# Altium PCB W040 24011506-06PBS PCB.PcbDoc (part 1 of 3)
Units mil, origin at the board's own origin, x right, y up, seen from the top; angles counter-clockwise.
Board outline 4320.55 x 590.55 mil, 4 copper layers (Top Layer, MidLayer1, MidLayer2, Bottom Layer); 218 components, 121 nets, 685 pads, 487 vias.
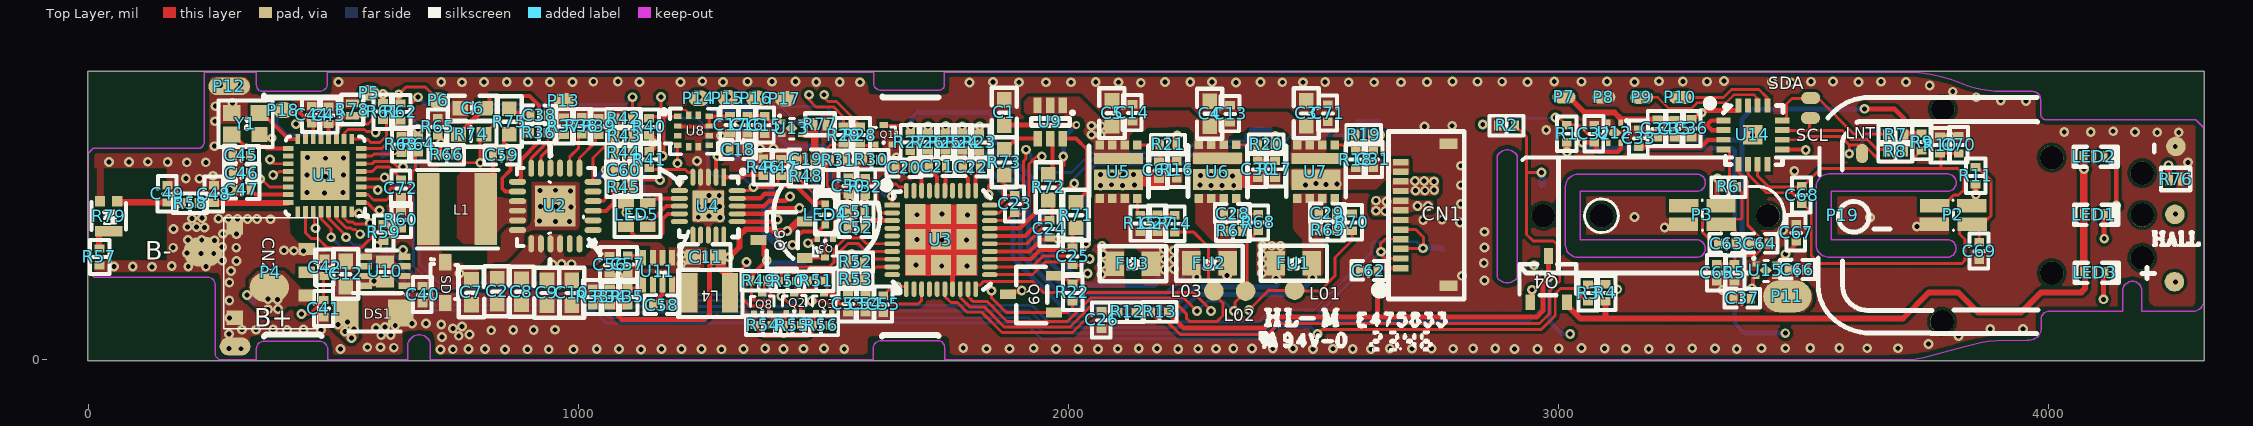
[diagram p0: Top Layer view]
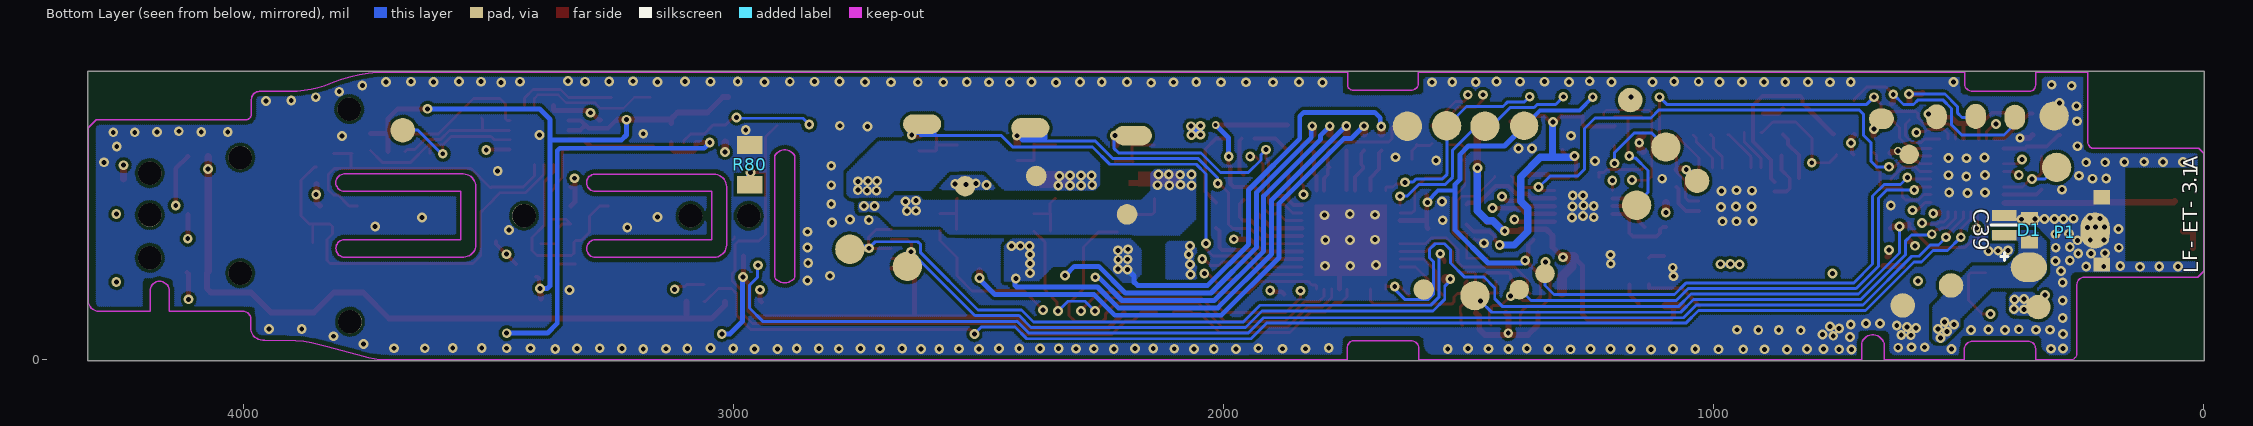
[diagram p1: Bottom Layer view, seen from below]
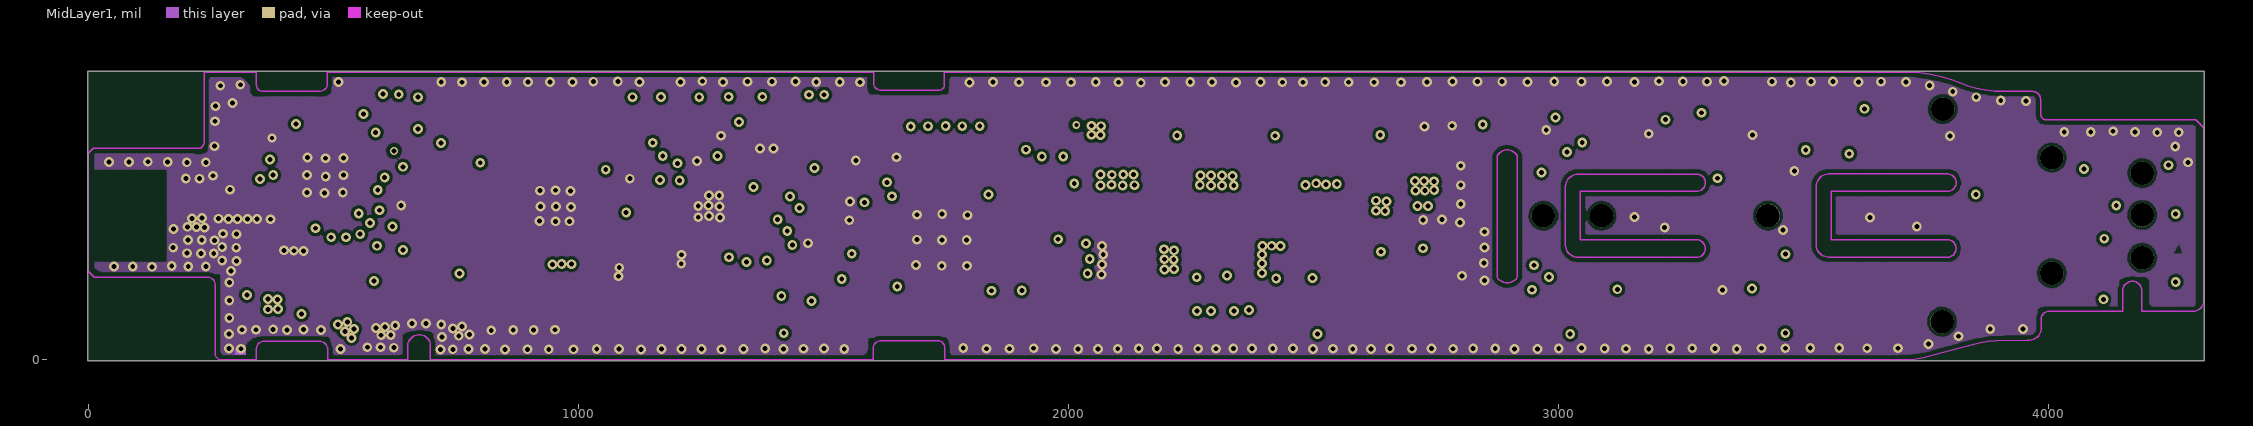
[diagram p2: MidLayer1]
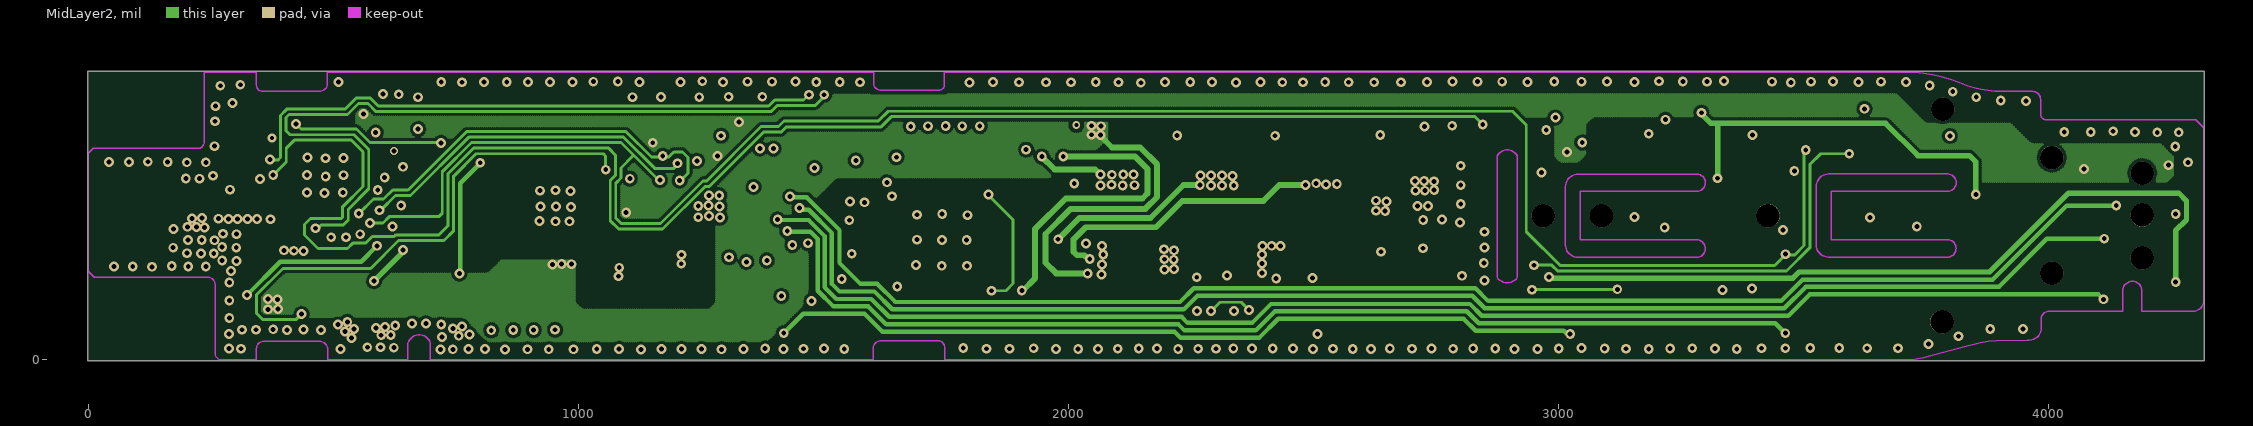
[diagram p3: MidLayer2]

## Layer stack, top to bottom
Top Solder: solder mask 0.4, Solder Resist, Dk 3.5
Top Layer: signal copper 1.4
Dielectric1: core 12.6, FR-4, Dk 4.8
MidLayer1: signal copper 1.4
Dielectric2: prepreg 12.6, FR-4, Dk 4.8
MidLayer2: signal copper 1.4
Dielectric3: core 12.6, FR-4, Dk 4.8
Bottom Layer: signal copper 1.4
Bottom Solder: solder mask 0.4, Solder Resist, Dk 3.5

## Board outline
-1.55,-1.5 4319.01,-1.5 4319.01,589.05 -1.55,589.05

## Design rules (kind name [scope] priority, off if disabled: settings)
Clearance Clearance_2 [All vs OnLayer('Top Layer')] p1 off: gap=5 ignorepadtopadclearanceinfootprint=FALSE except(0: Arc-Hole Track-Hole SMDPad-Hole THPad-Hole Via-Hole Fill-Hole Poly-Hole Region-Hole Text-Hole)
Clearance [All] p2: gap=5 ignorepadtopadclearanceinfootprint=FALSE except(0: Arc-Hole Track-Hole SMDPad-Hole THPad-Hole Via-Hole Fill-Hole Poly-Hole Region-Hole Text-Hole)
Clearance Clearance_1 [All] p3 off: gap=5 ignorepadtopadclearanceinfootprint=FALSE except(0: Arc-Hole Track-Hole SMDPad-Hole THPad-Hole Via-Hole Fill-Hole Poly-Hole Region-Hole Text-Hole)
ComponentClearance [All] p1 off: gap=10 collisioncheckmode=3 verticalgap=10 showdistances=FALSE
HoleSize [All] p1 off: absolutevalues=TRUE maxlimit=1000 minlimit=1 maxpercent=80.000 minpercent=20.000
LayerPairs [All] p1 off: enforce=TRUE
PlaneClearance [All] p1: clearance=10
PlaneConnect [All] p1: planeconnectstyle=Direct reliefexpansion=20 reliefentries=4 reliefconductorwidth=10 reliefairgap=10
PolygonConnect [All] p1 off: connectstyle=Direct reliefconductorwidth=20 reliefentries=4 polygonreliefangle="90 Angle" airgapwidth=10
PolygonConnect PolygonConnect_1 [All] p2: connectstyle=Direct reliefconductorwidth=20 reliefentries=4 polygonreliefangle="90 Angle" airgapwidth=10
RoutingLayers [All] p1: top layer_v5=FALSE mid layer 1_v5=FALSE mid layer 2_v5=FALSE bottom layer_v5=FALSE
RoutingVias [All] p1: holewidth=28 width=50 viastyle="Through Hole" minholewidth=10 minwidth=20 maxholewidth=1000 maxwidth=1000
SilkToSolderMaskClearance SilkscreenOverComponentPads [IsPad] p1: minsilkscreentomaskgap=10 clearancetoexposedcopper=TRUE
SolderMaskExpansion [All] p1: expansion=2 istentingtop=FALSE
Width [All] p1: maxlimit=10000 minlimit=4 preferedwidth=10
23 further rules are at their usual default settings.

## Components (designator, comment, footprint, x,y, rotation, side; value= is the part's Value field where it differs from the comment)
B+ "" SMD-1#1 299.43,27.55 r0 top
B- "NC" SMD-1#2 234.43,220.47 r0 top
C1 "10uF" C0603 1869.43,479.63 r0 top
C2 "22uF" C0603 834.43,114.63 r0 top
C3 "10uF" C0603 2485.68,477.97 r0 top
C4 "10uF" C0603 2288.6,477.13 r0 top
C5 "10uF" C0603 2089.43,478.38 r0 top
C6 "10uF" C0603 759.02,513.8 r270 top
C7 "10uF" C0603 781.93,112.55 r0 top
C8 "22uF" C0603 884.02,113.8 r0 top
C9 "10uF" C0603 936.1,111.72 r0 top
C10 "10uF" C0603 986.52,111.72 r0 top
C11 "22uF" C0603 1234.43,210.05 r270 top
C12 "10uF" C0603 525.27,150.05 r0 top
C13 "1uF" C0402#1 2330.47,484.63 r0 top
C14 "1uF" C0402#1 2131.1,486.72 r0 top
C15 "1uF" C0402#1 1380.68,461.72 r0 top
C16 "1uF" C0402#1 1345.27,462.13 r0 top
C17 "100nF" C0402#1 1309.85,462.13 r0 top
C18 "100nF" C0402#1 1308.6,428.8 r270 top
C19 "4.7uF" C0402#1 1446.93,409.63 r270 top
C20 "1nF" C0402#1 1647.35,392.55 r270 top
C21 "100pF" C0402#1 1715.27,394.63 r270 top
C22 "100pF" C0402#1 1784.43,393.38 r270 top
C23 "4.7uF" C0402#1 1890.89,300.68 r0 top
C24 "4.7uF" C0402#1 1961.52,250.05 r0 top
C25 "4.7uF" C0402#1 2009.02,193.8 r0 top
C26 "100nF" C0402#1 2068.18,63.9 r0 top
C27 "1nF" C0402#1 2181.93,261.3 r0 top
C28 "1nF" C0402#1 2317.77,298.38 r270 top
C29 "1nF" C0402#1 2511.1,299.22 r270 top
C30 "1nF" C0402#1 2386.93,371.3 r0 top
C31 "1nF" C0402#1 2622.35,391.72 r0 top
C32 "4.7uF" C0402#1 3073.6,443.8 r0 top
C33 "1uF" C0402#1 3164.43,435.05 r0 top
C34 "4.7uF" C0402#1 3202.35,454.63 r0 top
C35 "100nF" C0402#1 3237.77,454.22 r0 top
C36 "1uF" C0402#2 3271.93,454.43 r0 top
C37 "1uF" C0402#1 3357.77,125.47 r270 top
C38 "3.3nF" C0402#1 902.35,499.22 r270 top
C39 "100nF" C0402-1 402.35,254.63 r180 bottom
C40 "1uF" C0402#1 682.35,115.47 r0 top
C41 "100nF" C0402#1 480.68,87.13 r0 top
C42 "NC" C0402#1 482.35,171.3 r0 top
C43 "100nF" C0402#1 490.27,481.72 r0 top
C44 "4.7uF" C0402#1 456.1,482.97 r0 top
C45 "1uF" C0402#3 294.85,417.55 r270 top
C46 "NC" C0402#1 295.27,381.3 r270 top
C47 "2.2uF" C0402#1 295.68,347.55 r270 top
C48 "1.5pF" C0402#1 256.52,320.88 r0 top
C49 "1.5pF" C0402#1 161.52,321.3 r0 top
C50 "100nF" C0402#4 1551,338.07 r0 top
C51 "100nF" C0402#1 1549.02,302.34 r270 top
C52 "4.7uF" C0402#1 1549.33,269.63 r270 top
C53 "3.3nF" C0402#1 1550.68,96.72 r0 top
C54 "3.3nF" C0402#1 1586.1,96.72 r0 top
C55 "100nF" C0402#1 1622.35,95.88 r0 top
C56 "100nF" C0402#1 1064.02,176.72 r0 top
C57 "1uF" C0402#1 1101.1,177.13 r0 top
C58 "100nF" C0402#1 1153.18,112.13 r270 top
C59 "100nF" C0402#1 826.1,417.55 r270 top
C60 "100nF" C0402#1 1074.85,387.55 r270 top
C61 "1nF" C0402#1 2185.27,369.22 r0 top
C62 "NC" C0402#1 2595.68,182.13 r270 top
C63 "NC" C0402#1 3326.52,237.55 r270 top
C64 "NC" C0402#1 3394.02,237.55 r270 top
C65 "NC" C0402#1 3323.6,160.05 r0 top
C66 "NC" C0402#1 3470.27,184.22 r270 top
C67 "NC" C0402#1 3485.68,241.72 r0 top
C68 "NC" C0402#1 3496.93,318.8 r0 top
C69 "NC" C0402#1 3859.43,204.63 r0 top
C70 "NC" C0402#1 3817.35,421.3 r0 top
C71 "1uF" C0402#1 2529.85,485.88 r0 top
C72 "10nF" C0402#1 638.18,332.55 r0 top
CN1 "FH34SRJ-12S-0.5SH" SMD-12 2678.6,403.8 r270 top
CN2 "NC" SMD-1#2 369.43,148.38 r0 top
D1 "40V 代用" SOD-323 355.68,288.8 r270 bottom
DS1 "SMF26CA" SMD-128 525.27,96.3 r0 top
FU1 "0.02R" FU0805 2423.18,197.55 r0 top
FU2 "0.02R" FU0805 2251.1,197.13 r0 top
FU3 "0.02R" FU0805 2094.85,196.3 r0 top
L1 "CR4018-2R2M" L1206 693.6,307.97 r0 top
L01 "" DIP-1 2461.93,142.55 r0 top
L02 "" DIP-1 2361.93,140.47 r0 top
L03 "" DIP-1 2297.35,140.88 r0 top
L4 "4.7uH" L0805 1231.52,137.13 r0 top
LED1 "SZYY0402W 白光" LED0402#1 4072.77,296.72 r270 top
LED2 "SZYY0402W 白光" LED0402#1 4072.35,415.05 r270 top
LED3 "SZYY0402W 白光" LED0402#1 4074.43,178.38 r270 top
LED4 "SZYY0402W 白光" LED0402#2 1504.02,276.2 r0 top
LED5 "XL-1615UBUGC翠绿色 蓝色" LED0402-1 1141.52,271.72 r90 top
LNT "" SMD-1#3 3620.27,421.3 r90 top
P1 "78171插座端子2PIN" SMD-2 208.6,332.13 r0 bottom
P2 "丝印被打磨" SMD-4 3767.77,277.13 r0 top
P3 "丝印被打磨" SMD-4 3255.68,277.13 r0 top
P4 "78171插座端子3PIN" SMD-5 445.68,226.3 r180 top
P5 "" SMD-1#4 573.6,545.05 r180 top
P6 "" SMD-1#4 714.02,529.63 r180 top
P7 "" SMD-1#5 3011.93,536.72 r180 top
P8 "" SMD-1#5 3093.18,536.3 r180 top
P9 "" SMD-1#5 3170.27,535.88 r180 top
P10 "" SMD-1#5 3249.43,535.88 r180 top
P11 "" SMD-1#6 3467.77,129.63 r180 top
P12 "" SMD-1#7 287.35,558.38 r180 top
P13 "" SMD-1#4 970.27,529.22 r180 top
P14 "" SMD-1#4 1246.1,534.22 r180 top
P15 "" SMD-1#4 1304.85,534.63 r180 top
P16 "" SMD-1#4 1363.18,533.8 r180 top
P17 "" SMD-1#4 1421.93,533.38 r180 top
P18 "" SMD-1#4 398.18,510.05 r180 top
P19 "" SMD-10 4191.93,381.3 r180 top
Q2 "2SK3541" SOT23-3-1#1 1429.43,96.3 r0 top
Q3 "2SK3541" SOT23-3-1#1 1490.27,95.88 r0 top
Q4 "S8550" SOT23-3#1 2943.18,117.97 r0 top
Q5 "2SK3541" SOT23-3-1#2 1514.95,246.82 r180 top
Q6 "AO3401A" SOT23-3#2 1461.93,207.97 r90 top
Q8 "2SK3541" SOT23-3-1#3 1364.02,95.26 r0 top
Q9 "AO3401A" SOT23-3#2 1971.1,97.13 r90 top
Q11 "2SK3541" SOT23-3-1#1 1611.93,440.05 r0 top
R1 "10K" R0402#1 3017.35,444.63 r0 top
R2 "150K" R0402#1 2877.35,478.8 r270 top
R3 "10K" R0402#1 3061.1,119.22 r0 top
R4 "10K" R0402#1 3096.52,119.63 r0 top
R5 "301K" R0402#1 3359.85,160.88 r0 top
R6 "301K" R0402#1 3330.27,353.38 r270 top
R7 "2K" R0402#1 3671.52,460.05 r270 top
R8 "2K" R0402#1 3671.1,425.05 r270 top
R9 "2K" R0402#1 3741.52,427.55 r0 top
R10 "301K" R0402#1 3779.43,421.3 r0 top
R11 "301K" R0402#1 3851.93,358.8 r0 top
R12 "100R" R0402#2 2102.77,97.97 r270 top
R13 "100K" R0402#2 2169.02,98.38 r270 top
R14 "10R" R0402#1 2217.35,260.88 r0 top
R15 "10K" R0402#1 2146.93,261.3 r0 top
R16 "10K" R0402#1 2221.52,370.88 r0 top
R17 "10K" R0402#1 2421.93,372.13 r0 top
R18 "10K" R0402#1 2586.93,391.72 r0 top
R19 "10R" R0402#1 2586.1,460.05 r270 top
R20 "10R" R0402#1 2386.93,440.47 r270 top
R21 "10R" R0402#1 2186.52,440.05 r270 top
R22 "20K" R0402#3 2008.6,119.63 r0 top
R23 "100R" R0402#1 1818.6,426.72 r0 top
R24 "100R" R0402#1 1784.02,427.55 r0 top
R25 "100R" R0402#1 1749.43,427.55 r0 top
R26 "100R" R0402#1 1713.6,427.55 r0 top
R27 "1K" R0402#1 1677.77,427.13 r0 top
R28 "22R" R0402#1 1574.85,441.72 r0 top
R29 "22R" R0402#1 1541.52,441.72 r0 top
R30 "10K" R0402#1 1581.1,408.8 r270 top
R31 "10K" R0402#1 1513.6,407.97 r270 top
R32 "20K" R0402#1 1585.68,336.72 r0 top
R33 "150K" R0402#1 1029.43,111.3 r0 top
R34 "NC" R0402#1 1064.85,111.3 r0 top
R35 "1M" R0402#1 1100.27,111.72 r0 top
R36 "51K" R0402#4 903.18,463.8 r270 top
R37 "180K" R0402#1 971.1,459.63 r0 top
R38 "120K" R0402#1 1006.93,460.47 r0 top
R39 "1K" R0402#1 1041.93,459.22 r0 top
R40 "4.7K" R0402#1 1144.43,458.8 r0 top
R41 "4.7K" R0402#1 1145.06,391.72 r0 top
R42 "15K" R0402#1 1075.68,492.97 r270 top
R43 "10K" R0402#1 1076.1,457.13 r270 top
R44 "82K" R0402#1 1075.68,422.55 r270 top
R45 "NC" R0402#1 1075.68,352.97 r270 top
R46 "8.2K" R0402#1 1377.35,376.3 r0 top
R47 "100K" R0402#1 1413.6,375.47 r0 top
R48 "20K" R0402#1 1447.35,374.63 r270 top
R49 "10K" R0402#1 1351.31,161.93 r270 top
R50 "10K" R0402#2 1409.85,161.09 r270 top
R51 "10K" R0402#2 1468.6,161.4 r270 top
R52 "10K" R0402#1 1549.43,200.05 r270 top
R53 "10K" R0402#1 1549.02,165.05 r270 top
R54 "10K" R0402#2 1360.27,71.3 r270 top
R55 "10K" R0402#2 1419.85,71.3 r270 top
R56 "10K" R0402#2 1478.6,70.88 r270 top
R57 "0R" R0402#1 22.77,192.97 r0 top
R58 "0R" R0402#1 190.68,320.05 r270 top
R59 "1M" R0402#1 602.77,242.97 r0 top
R60 "100K" R0402#1 638.18,268.8 r0 top
R61 "100R" R0402#1 601.72,489.63 r0 top
R62 "100R" R0402#1 636.93,488.8 r0 top
R63 "0R" R0402#1 639.02,422.55 r0 top
R64 "1K" R0402#1 673.6,423.38 r0 top
R65 "3K" R0402#1 713.18,458.8 r0 top
R66 "2K" R0402#1 714.43,419.22 r270 top
R67 "10K" R0402#1 2319.43,263.38 r270 top
R68 "10R" R0402#1 2387.77,263.38 r0 top
R69 "10K" R0402#1 2511.93,264.63 r270 top
R70 "10R" R0402#1 2579.02,263.8 r0 top
R71 "10R" R0603 2015.68,269.63 r0 top
R72 "10R" R0603 1959.43,326.3 r0 top
R73 "10R" R0603 1869.43,377.55 r0 top
R74 "0.5R" R0603 755.68,460.88 r270 top
R75 "2R" R0603 859.02,460.47 r0 top
R76 "NC" R0201 4247.35,369.22 r270 top
R77 "NC" R0201 1480.27,480.88 r270 top
R78 "NC" R0201 539.02,498.38 r0 top
R79 "不知型号" R0603-1 41.52,262.97 r0 top
R80 "NC" R0805 2962.77,357.55 r180 bottom
SCL "" SMD-1#3 3514.85,493.8 r0 top
SD "GBLC05C-N" SMA-502 728.6,116.3 r0 top
SDA "" SMD-1#3 3515.27,534.63 r180 top
U1 "PHY6222QC-W04C" OFN-32 556.93,321.72 r90 top
U2 "IP2326" OFN-24 1030.27,265.05 r90 top
U3 "丝印 LKS32MC LFDF6Q8" QFP-40 1640.68,315.88 r270 top
U4 "丝印 HTR3212S XA2801A" OFN-20 1296.93,372.97 r180 top
U5 "丝印 BM3020 PS" SOP-8 2141.1,438.8 r180 top
U6 "丝印 BM3020 PS" SOP-8 2343.18,439.22 r180 top
U7 "丝印 BM3020 PS" SOP-8 2544.02,438.8 r180 top
U8 "丝印 6 F08" SOP-12 1203.18,497.13 r270 top
U9 "BAS16VY" SOP-6 1988.6,520.05 r180 top
U10 "丝印 MAICN" "SOP-8 - 1" 645.27,151.72 r90 top
U11 "MP2322GQH-Z" SOP-8-2 1191.52,208.59 r180 top
U12 "RP130K221D-TR" SOP4#1 3127.77,483.8 r180 top
U13 "RP130K221D-TR" SOP4#2 1415.27,485.88 r270 top
U14 "CSU18M68-QFN16" OFN-16 3337.35,488.8 r270 top
U15 "NC" SOP4#3 3403.6,195.47 r270 top
Y1 "16MHZ" OSC5032-4P 292.77,504.22 r270 top

## Footprints (in the part's own frame and the unit in brackets; to place one, negate y for a bottom-side part, rotate by r counter-clockwise, add the part's x,y. Pads: shape width x height; smd on the part's side, far side on the other; paste and mask are expansions set on the pad)
C0402#1 [mil]
  rect 20x17 smd: 1(0,0) 2(0,35.42)
  silkscreen extent -20,-18 19,54
C0402#2 [mil]
  rect 20x17 smd: 1(0,0) 2(0,36.57)
  silkscreen extent -20,-18 19,54
C0402#3 [mil]
  rect 20x17 smd: 1(0,0)
  rect 17x17 smd: 2(0,35.42)
  silkscreen extent -20,-18 19,54
C0402#4 [mil]
  rect 20x17 smd: 1(0,0) 2(0,34.03)
  silkscreen extent -20,-18 19,54
C0402-1 [mil]
  rect 50x22 smd: 1(-5,0) 2(-5,40.42)
  silkscreen extent -32,21 23,21
C0603 [mil]
  rect 30x32 smd: 1(0,0) 2(0,50.9)
  silkscreen extent -26,-25 26,76
DIP-1 [mil]
  round 40 smd: 1(0,0)
FU0805 [mil]
  rect 38x50 smd: 1(0,0) 2(74.17,0)
  silkscreen extent -30,-36 105,36
L0805 [mil]
  rect 33x80 smd: 1(-5,0) 2(78.33,0)
  silkscreen extent -28,-50 103,47
L1206 [mil]
  rect 46x147 smd: 1(0,0) 2(117.92,0)
  silkscreen extent -23,-80 143,80
LED0402#1 [mil]
  rect 22x16 smd: 1(0,0) 2(0,41.25)
  silkscreen extent -22,-20 21,70
LED0402#2 [mil]
  rect 16x16 smd: 1(0,0) 2(0,41.25)
  silkscreen extent -22,-20 21,70
LED0402-1 [mil]
  rect 21x32 smd: 1(0,0) 2(48.33,0) 3(48.33,44.17) 4(0,44.17)
  silkscreen extent -20,-26 65,68
OFN-16 [mil]
  rect 12x29 smd: 1(0,0) 2(19.68,0) 3(39.37,0) 4(59.06,0) 9(59.06,119.89) 10(39.37,119.89) 11(19.69,119.89) 12(0,119.89)
  rect 29x12 smd: 5(89.47,30.42) 6(89.47,50.1) 7(89.47,69.79) 8(89.47,89.47) 13(-30.42,89.47) 14(-30.42,69.79) 15(-30.42,50.1) 16(-30.42,30.42)
  rect 40x40 smd: 17(29.53,59.94)
  silkscreen extent -42,-35 90,121
OFN-20 [mil]
  rect 10x35 smd: 1(0,0)
  oval 10x35 smd: 2(15.75,0) 3(31.5,0) 4(47.24,0) 5(62.99,0) 11(62.99,117.99) 12(47.24,117.99) 13(31.5,117.99) 14(15.75,117.99) 15(0,117.99)
  oval 35x10 smd paste+0: 6(90.49,27.5) 7(90.49,43.25) 8(90.49,59) 9(90.49,74.74) 10(90.49,90.49)
  rect 65x63 smd: 13(31.5,59)
  oval 35x10 smd: 16(-27.5,90.49) 17(-27.5,74.74) 18(-27.5,59) 19(-27.5,43.25) 20(-27.5,27.5)
  silkscreen extent -40,-12 91,122
OFN-24 [mil]
  rect 83x83 smd: 0(49.21,77.13)
  oval 12x35 smd: 1(0,0) 2(19.68,0) 3(39.37,0) 4(59.06,0) 5(78.74,0) 6(98.43,0) 13(98.43,154.26) 14(78.74,154.26) 15(59.06,154.26) 16(39.37,154.26) 17(19.68,154.26) 18(0,154.26)
  oval 35x12 smd: 7(126.34,27.92) 8(126.34,47.6) 9(126.34,67.29) 10(126.34,86.97) 11(126.34,106.66) 12(126.34,126.34) 19(-27.92,126.34) 20(-27.92,106.66) 21(-27.92,86.97) 22(-27.92,67.29) 23(-27.92,47.6) 24(-27.92,27.92)
  silkscreen extent -32,-4 127,155
OFN-32 [mil]
  rect 100x100 smd: 0(55.12,74.28)
  rect 10x21 smd: 1(0,0) 2(15.75,0) 3(31.5,0) 4(47.24,0) 5(62.99,0) 6(78.74,0) 7(94.49,0) 8(110.24,0) 17(110.24,148.57) 18(94.49,148.57) 19(78.74,148.57) 20(62.99,148.57) 21(47.24,148.57) 22(31.5,148.57) 23(15.75,148.57) 24(0,148.57)
  rect 21x10 smd: 9(129.4,19.17) 10(129.4,34.91) 11(129.4,50.66) 12(129.4,66.41) 13(129.4,82.16) 14(129.4,97.91) 15(129.4,113.65) 16(129.4,129.4) 25(-19.17,129.4) 32(-19.17,19.17)
  rect 23x10 smd: 26(-19.17,113.65) 27(-19.17,97.91) 28(-19.17,82.16) 29(-19.17,66.41) 30(-19.17,50.66) 31(-19.17,34.91)
  silkscreen extent -28,-8 134,155
OSC5032-4P [mil]
  rect 33x36 smd: 1(0,0) 2(44.17,0) 4(0,56.67)
  rect 30x33 smd: 3(44.17,56.67)
  silkscreen extent -25,-27 69,84
QFP-40 [mil]
  rect 10x32 smd: 1(0,0)
  oval 10x32 smd: 2(15.75,0) 3(31.5,0) 4(47.24,0) 5(62.99,0) 6(78.74,0) 7(94.49,0) 8(110.24,0) 9(125.98,0) 10(141.73,0) 21(141.73,199.23) 22(125.98,199.23) 23(110.24,199.23) 24(94.49,199.23) 25(78.74,199.23) 26(62.99,199.23) 27(47.24,199.23) 28(31.5,199.23) 29(15.75,199.23) 30(0,199.23)
  oval 32x10 smd: 11(171.25,28.75) 12(171.25,44.5) 13(171.25,60.25) 14(171.25,75.99) 15(171.25,91.74) 16(171.25,107.49) 17(171.25,123.24) 18(171.25,138.99) 19(171.25,154.73) 20(171.25,170.48) 31(-29.52,170.48) 32(-29.52,154.73) 33(-29.52,138.99) 34(-29.52,123.24) 35(-29.52,107.49) 36(-29.52,91.74) 37(-29.52,75.99) 38(-29.52,60.25) 39(-29.52,44.5) 40(-29.52,28.75)
  rect 41x41 smd: 17(17.92,151.67) 17(17.92,99.17) 17(17.92,47.08) 17(69.58,152.08) 17(69.58,47.5) 17(69.58,100) 17(122.08,151.67) 17(122.08,47.5) 17(122.08,99.58)
  silkscreen extent -48,-19 172,201
R0201 [mil]
  rect 26x15 smd: 1(0,0) 2(0,25.42)
  silkscreen extent -23,-17 23,43
R0402#1 [mil]
  rect 20x17 smd: 1(0,0) 2(0,34.58)
  silkscreen extent -20,-18 20,52
R0402#2 [mil]
  rect 17x17 smd: 1(0,0) 2(0,34.58)
  silkscreen extent -20,-18 20,52
R0402#3 [mil]
  rect 20x17 smd: 1(0,0) 2(0,36.37)
  silkscreen extent -20,-18 20,52
R0402#4 [mil]
  rect 20x17 smd: 1(0,-2.18) 2(0,34.58)
  silkscreen extent -20,-18 20,52
R0603 [mil]
  rect 30x30 smd: 1(0,0) 2(0,52.08)
  silkscreen extent -26,-25 26,78
R0603-1 [mil]
  rect 56x21 smd: 1(0,0)
  rect 21x21 smd: 2(17.29,61.25) 3(-17.5,61.25)
  silkscreen extent -35,3 35,59
R0805 [mil]
  rect 52x36 smd: 1(-5,0) 2(-5,81.25)
SMA-502 [mil]
  rect 25x33 smd: 1(0,0) 2(0,83.12)
  silkscreen extent -30,8 26,90
SMD-1#1 [mil]
  oval 63x37 smd: 1(0,0)
SMD-1#2 [mil]
  oval 80x60 smd: 1(0,0)
SMD-1#3 [mil]
  oval 39x25 smd: 1(0,0)
SMD-1#4 [mil]
  oval 42x32 smd: 1(0,0)
SMD-1#5 [mil]
  oval 47x26 smd: 1(0,0)
SMD-1#6 [mil]
  oval 99x65 smd: 1(0,0)
SMD-1#7 [mil]
  oval 85x36 smd: 1(0,0)
SMD-2 [mil]
  oval 74x60 smd: 1(148.33,142.92)
  oval 60x74 smd: 2(13.12,67.71)
  rect 33x29 smd: 3(-0.42,0) 4(-0.42,137.29)
SMD-4 [mil]
  rect 60x27 smd: 1(0,0) 2(0.42,37.5) 3(76.67,37.5) 4(77.08,0)
  silkscreen extent 38,-12 39,50
SMD-5 [mil]
  rect 34x30 smd: 0(146.87,140.42) 0(146.88,-45)
  rect 34x24 smd: 1(0,0) 2(0,47.5) 3(0,94.58)
  silkscreen extent -23,-64 169,163
SMD-10 [mil]
  round 48 hole 48: 0(407.08,-130.62) 0(408.54,303.13) 0(763.75,86.67) 0(1103.54,87.08) 0(1222.29,87.08) 1(0,172.92) 2(0,85.42) 3(0,0) 4(184.58,-31.67) 5(184.58,204.17)
  silkscreen extent 212,-155 1267,327
SMD-12 [mil]
  rect 22x36 smd: 0(-37.62,97.5) 0(252.38,97.5)
  rect 13x32 smd: 1(216.54,0) 2(196.85,0) 3(177.17,0) 4(157.48,0) 5(137.8,0) 6(118.11,0) 7(98.43,0) 8(78.74,0) 9(59.06,0) 10(39.37,0) 11(19.68,0) 12(0,0)
  silkscreen extent -62,-25 279,130
SMD-128 [mil]
  rect 52x55 smd: 1(0,0) 2(112.5,0)
  silkscreen extent 5,-38 115,40
SOD-323 [mil]
  rect 26x35 smd: 1(47.92,0) 2(0,0)
SOP4#1 [mil]
  rect 10x13 smd: 1(0,0) 2(25.59,0) 3(25.59,40.21) 4(0,40.21)
  rect 20x20 smd rot 45: 2(12.8,20.1)
  silkscreen extent -12,-5 35,26
SOP4#2 [mil]
  rect 10x15 smd: 1(0,0) 2(25.59,0) 3(25.59,40.21) 4(0,40.21)
  rect 18x18 smd rot 45: 2(12.8,20.1)
  silkscreen extent -12,-5 35,26
SOP4#3 [mil]
  rect 18x18 smd rot 45: 0(12.8,20.1)
  rect 10x15 smd: 1(0,0) 2(25.59,0) 3(25.59,40.21) 4(0,40.21)
  silkscreen extent -12,-5 35,26
SOP-6 [mil]
  rect 17x32 smd: 1(0,0) 2(25.59,0) 3(51.18,0) 4(50.83,68.33) 5(25.24,68.33) 6(-0.35,68.33)
  silkscreen extent -21,15 64,41
SOP-8 [mil]
  rect 17x18 smd: 1(0,0) 2(25.59,0) 3(51.18,0) 4(76.77,0) 5(76.77,109.58) 6(51.18,109.58) 7(25.59,109.58) 8(0,109.58)
  rect 100x23 smd: 9(38.33,27.5)
  rect 100x42 smd: 10(38.33,70.83)
  silkscreen extent -23,2 99,106
"SOP-8 - 1" [mil]
  rect 13x25 smd: 1(0,0) 2(19.68,0) 3(39.37,0) 4(59.06,0) 5(59.06,78.96) 6(39.37,78.96) 7(19.68,78.96) 8(0,78.96)
  rect 25x37 smd: 3(48.75,39.37) 8(8.54,39.58)
  silkscreen extent -20,-6 72,86
SOP-8-2 [mil]
  rect 12x32 smd: 1(0,0) 2(19.69,0) 3(39.37,0) 4(59.06,0) 5(59.06,54.58) 6(39.37,54.58) 7(19.69,54.58) 8(0,54.58)
  silkscreen extent -19,-25 71,74
SOP-12 [mil]
  rect 11x15 smd: 1(0,0) 2(19.69,0) 3(39.37,0) 4(59.06,0) 7(59.06,63.85) 8(39.37,63.85) 9(19.69,63.85) 10(0,63.85)
  rect 15x11 smd: 5(61.67,22.08) 6(61.67,41.77) 11(-2.61,41.77) 12(-2.61,22.08)
  silkscreen extent -16,-32 77,83
SOT23-3#1 [mil]
  rect 20x32 smd: 1(0,0) 2(74.58,0)
  rect 18x32 smd: 3(37.08,94.17)
  silkscreen extent -22,14 93,77
SOT23-3#2 [mil]
  rect 20x32 smd: 1(0,0) 2(74.58,0) 3(37.08,94.17)
  silkscreen extent -22,14 93,77
SOT23-3-1#1 [mil]
  rect 12x12 smd: 1(-5,0) 2(27.08,0)
  rect 17x12 smd: 3(11.25,39.58)
  silkscreen extent -12,2 35,35
SOT23-3-1#2 [mil]
  rect 12x12 smd: 1(-5,0) 2(27.08,0)
  rect 17x12 smd: 3(11.25,37.82)
  silkscreen extent -13,2 35,35
SOT23-3-1#3 [mil]
  rect 12x12 smd: 1(-5,0) 2(27.08,0)
  rect 17x12 smd: 3(11.25,40.74)
  silkscreen extent -12,2 35,35

## Part data
B+ B- CN2 LNT P5 P6 P7 P8 P9 P10 P11 P12 P13 P14 P15 P16 P17 P18 P19 SCL SDA: library part CON1, "Connector"
C1 C2 C3 C4 C5 C6 C7 C8 C9 C10 C11 C12 C13 C14 C15 C16 C17 C18 C19 C20 C21 C22 C23 C24 C25 C26 C27 C28 C29 C30 C31 C32 C33 C34 C35 C36 C37 C38 C39 C40 C41 C42 C43 C44 C45 C46 C47 C48 C49 C50 C51 C52 C53 C54 C55 C56 C57 C58 C59 C60 C61 C62 C63 C64 C65 C66 C67 C68 C69 C70 C71 C72: library part CAP, "Capacitor"
CN1: library part CON12, "Connector"
D1: library part "DIODE VARACTOR", "Varactor Diode"
DS1: library part DIODE-3
FU1 FU2 FU3 R1 R3 R4 R5 R6 R7 R8 R9 R10 R11 R12 R13 R14 R15 R16 R17 R18 R19 R20 R21 R22 R23 R24 R25 R26 R27 R28 R29 R30 R31 R32 R33 R34 R35 R36 R37 R38 R39 R40 R41 R42 R43 R44 R45 R46 R47 R48 R49 R50 R51 R52 R53 R54 R55 R56 R57 R58 R59 R60 R61 R62 R63 R64 R65 R66 R67 R68 R69 R70 R71 R72 R73 R74 R75 R76 R77 R78 R80: library part RAS
L1 L4: library part INDUCTOR
L01 L02 L03: library part T
LED1 LED2 LED3 LED4: library part LED
LED5: library part LED-1
P1: library part CON2, "Connector"
P2 P3 U15: library part 4
P4: library part CON3., "Connector"
Q2 Q3 Q5 Q8 Q11: library part 2SK2462
Q4: library part PNP-BEC, "PNP Transistor"
Q6 Q9: library part P-GSD
R2: library part RES2-R
R79: library part 3
SD: library part BV05C
U3: library part LKS32MC084DF6Q8
U4: library part HTR3212S
U5 U6 U7: library part CJBM3020
U8: library part 12
U9: library part DIODE6
U10: library part 8
U12 U13: library part RP114K121D5
U14: library part CSU18M68
Y1: library part CRYSTAL4-1

## Free pads (board coordinates)
  round 60 smd far side: ""(300.27,392.97) ""(305.27,497.97) ""(1097.77,434.63) ""(1157.35,315.88) ""(1466.93,477.13) ""(1487.35,131.3) ""(1545.27,477.97) ""(1625.27,477.13) ""(2645.68,190.88) ""(2763.18,225.88)
  round 50 smd far side: ""(337.77,107.97) ""(515.68,152.13) ""(614.43,111.3) ""(1034.02,365.47) ""(1170.27,530.47) ""(3675.68,469.01)
  oval 42x51 smd far side: ""(385.27,495.47) ""(465.27,497.13) ""(545.27,496.3)
  round 40 smd far side: ""(601.1,419.63) ""(1344.43,176.72) ""(1396.93,143.38)
  oval 51x42 smd far side: ""(657.77,492.13)
  round 58 smd far side: ""(1386.93,477.97)
  round 42 smd far side: ""(1591.93,143.8) ""(2197.35,297.13) ""(2382.77,375.47) ""(2527.77,354.63)
  oval 78x40 smd far side: ""(2185.68,457.97) ""(2394.85,473.8) ""(2615.68,481.3)
  round 40 smd: ""(4257.77,159.63) ""(4258.6,297.13) ""(4260.68,435.88)

## Via types
v1: diameter 20, hole 10, Top Layer to Bottom Layer, tented both sides, 484 vias
v2: diameter 16, hole 8, Top Layer to Bottom Layer, tented both sides, 1 vias
v3: diameter 16, hole 10, Top Layer to Bottom Layer, tented both sides, 1 vias
v4: diameter 18, hole 8, Top Layer to Bottom Layer, tented both sides, 1 vias

## Nets (pads, with @x,y where several pads share a name; then routed paths per layer and width w, separated by ;. In a path a pad name is that pad's centre, name@x,y a point inside that pad or via, vN(x,y) a via of type N, cw(c..) or ccw(c..) an arc to the next point about the centre after c; other vN are vias at no path point)
CN1-2: CN1.2 CN1.4 pad.@2645.68,190.88 R53.1 | length 1376.7
  Top Layer w6: CN1.2@2678.6,206.95 2647.12,206.95 2637.35,216.72 2637.35,237.13 2646.54,246.32 CN1.4@2678.6,246.32
  Top Layer w20: v1(1537.77,165.47) 1538.18,165.05 R53.1@1546.83,165.05
  Bottom Layer w6: v1(1537.77,165.47) 1537.77,161.72 1549.02,150.47 1549.02,123.8 1572.97,99.84 1922.25,99.84 1955.79,66.3 2393.39,66.3 2417.56,90.47 2508.18,90.47 v1(2638.6,220.88)
  Bottom Layer w15: v1(2638.6,220.88) 2645.68,213.8 pad.@2645.68,190.88
CN1-3: CN1.3 CN1.5 pad.@2763.18,225.88 R52.1 | length 1539.5
  Top Layer w6: CN1.5@2678.6,266 2709.31,266 2724.85,250.47 2724.85,228.8 2723.18,227.13 CN1.3@2679.1,227.13
  Top Layer w9: R52.1@1549.43,200.05 1549.43,203.38 1559.02,212.97 v1@1559.02,217.55
  Bottom Layer w6: v1(1558.18,216.72) 1561.1,213.8 1561.1,127.97 1577.35,111.72 1926.1,111.72 1960.27,77.55 2388.6,77.55 2412.77,101.72 2501.52,101.72 2618.6,218.8 2618.6,235.47 2624.43,241.3 2711.52,241.3 v1@2724.02,228.8
  Bottom Layer w12: v1@2724.02,228.8 2724.43,229.22 2759.85,229.22 pad.@2763.18,225.88
  other v1: 2724.02,227.97
GND: B+.1 B-.1 C1.2 C2.1 C3.2 C4.2 C5.2 C6.1 C7.1 C8.1 C9.1 C10.1 C11.1 C12.2 C13.2 C14.2 C15.1 C16.1 C17.1 C18.2 C19.1 C20.1 C26.1 C32.2 C33.2 C34.1 C35.1 C36.1 C37.1 C38.2 C39.2 C40.1 C41.1 C42.2 C43.2 C44.2 C45.1 C46.1 C47.1 C48.2 C49.2 C50.1 C51.1 C52.1 C53.1 C54.1 C55.1 C56.1 C57.1 C60.2 C62.1 C64.2 C65.1 C66.2 C67.2 C69.1 C70.2 C71.2 C72.1 CN1.0 CN1.6 D1.2 DS1.2 FU3.1 P1.2 P1.3 P1.4 P2.1 P3.1 P4.0 P4.1 P8.1 P12.1 P13.1 P17.1 pad.@305.27,497.97 pad.@614.43,111.3 pad.@1625.27,477.13 pad.@4260.68,435.88 Q5.2 Q11.2 R2.1 R5.1 R10.2 R30.1 R31.2 R33.2 R37.2 R38.2 R39.2 R42.1 R44.2 R45.2 R46.2 R47.2 R57.1 R60.2 R63.2 R65.2 R76.2 R77.2 R78.2 R79.3 R80.2 SD.1 U1.0 U2.0 U2.18 U3.17 U4.3 U4.4 U4.13 U8.6 U8.8 U10.3 U10.5 U11.1 U12.2 U13.2 U14.17 U15.1 Y1.1 Y1.3 | length 149.2
  Top Layer w6: v1(1469.02,238.38) 1472.35,238.38 1478.6,244.63 1485.68,244.63 Q5.2@1488.6,247.55
  Top Layer w10: U3.17@1763.92,144.63 1763.92,199.94
  Top Layer w12: Y1.3@349.43,459.22 355.68,452.97 v4(374.85,452.97) ; U10.3@615.06,192.13 U10.3@653.6,192.13 ; 1763.7,200.15 1766.52,202.97
  other v1: 719.02,21.3 744.02,21.72 850.68,21.3 896.1,21.72 939.85,21.72 990.27,21.72 1128.18,21.3 1292.35,21.72 514.43,22.13 775.68,22.13 809.85,22.13 1037.77,22.13 1083.18,22.55 1169.85,22.13 1210.68,22.55 1251.52,22.13 1337.35,22.55 1419.02,22.13 1542.77,22.55 1975.27,22.55 2020.27,22.55 2060.68,22.13 2224.43,22.55 2499.85,22.55 2580.68,22.55 2617.77,22.55 2911.1,22.55 2957.77,22.55 3184.85,22.55 3364.43,22.55 287.35,23.38 311.52,22.97 1381.52,23.38 1459.43,22.97 1501.52,23.38 1833.18,22.97 1880.27,22.97 1929.43,23.8 2101.1,22.97 2144.02,23.38 2181.1,23.38 2265.27,22.97 2301.52,22.97 2336.93,23.38 2374.85,23.38 2417.35,23.38 2458.6,23.38 2540.68,22.97 2656.35,23.55 2701.52,22.97 2741.52,23.38 2785.68,22.97 2826.52,23.38 2871.52,23.38 3001.1,23.38 3094.85,23.38 3138.6,22.97 3228.6,23.38 3273.6,23.8 3319.85,23.38 3414.85,23.8 3463.6,23.8 3630.68,23.8 3693.6,23.8 1785.68,24.63 3047.35,24.22 3514.43,24.22 3573.6,24.22 623.6,25.05 569.43,25.88 596.1,25.88 3756.1,32.55 721.93,46.72 3816.93,48.38 756.1,49.22 597.77,50.47 617.35,50.88 777.77,52.13 287.35,52.97 822.35,60.47 313.6,61.72 342.35,61.72 405.68,61.3 474.85,61.3 867.35,60.88 909.02,60.88 952.77,61.72 377.35,62.55 439.43,62.13 3881.93,62.97 3948.6,62.97 744.02,64.22 586.93,65.47 605.68,67.13 762.77,68.38 626.52,70.05 720.27,72.13 660.68,74.22 689.43,74.63 287.77,85.47 287.77,121.3 3335.27,142.97 287.77,157.97 2849.43,162.13 1082.35,170.88 2803.6,171.72 2068.18,174.22 291.1,181.3 1083.6,188.38 90.68,190.47 129.85,190.05 204.02,190.47 239.85,190.47 52.35,190.88 170.27,191.72 1741.93,192.13 1793.6,192.13 1689.43,193.8 2069.02,195.05 1210.27,196.3 2848.18,197.97 302.35,202.13 273.18,202.97 1210.68,214.63 2071.52,215.47 229.85,217.55 256.1,217.13 201.52,217.97 439.02,222.55 399.43,223.8 419.43,222.97 173.18,229.22 301.93,229.22 2849.85,229.63 273.18,230.47 2069.02,232.55 257.35,244.22 1792.77,244.63 203.18,245.05 231.52,245.05 1691.1,245.47 1742.35,245.05 302.35,256.72 274.85,257.55 2849.43,261.72 3459.02,265.47 173.6,267.55 237.35,270.47 3217.35,270.47 202.35,271.72 220.68,271.3 3731.93,272.55 2799.85,280.47 921.1,283.8 953.6,282.97 981.93,282.97 1553.18,285.05 2724.43,285.88 2762.77,286.72 304.43,287.55 344.43,287.55 371.93,287.13 265.68,288.38 286.1,287.97 324.85,287.97 211.93,288.8 231.93,289.63 1289.43,290.47 1244.85,291.3 3155.68,291.72 3636.52,290.88 1266.52,293.8 1794.43,295.47 1691.1,296.3 1742.77,297.97 985.27,312.13 922.77,312.97 954.43,312.97 1288.18,313.38 1244.85,314.22 638.6,315.05 1265.68,315.47 2801.1,318.38 1554.43,323.38 1266.52,335.47 1287.77,335.88 481.93,340.47 446.52,341.72 519.43,341.72 984.43,344.63 921.93,345.47 953.6,346.3 289.02,347.55 2801.1,356.72 199.02,370.47 226.93,370.05 1105.27,370.05 484.43,374.63 254.43,375.88 446.52,377.55 521.1,377.13 3481.93,385.88 2801.1,396.3 82.77,403.8 201.1,403.38 239.85,403.38 4285.68,403.38 42.35,404.22 121.52,404.63 161.93,404.22 1242.35,406.3 1566.52,407.13 484.02,411.72 520.68,412.13 447.35,413.38 1649.43,413.8 1370.68,431.51 1398.6,431.3 4259.43,435.47 257.35,436.3 1291.52,457.55 3799.43,457.13 3396.52,459.22 3184.85,461.72 4222.77,464.63 4266.52,464.63 4032.77,465.05 4086.93,465.47 4177.35,465.47 4132.77,466.72 2975.68,469.22 2727.35,476.72 2783.6,477.97 258.6,487.13 259.43,517.97 294.02,524.63 3903.18,529.63 3954.85,528.8 3853.18,536.3 3805.27,547.55 269.43,559.63 3758.18,560.47 310.27,561.72 762.77,566.72 1575.27,566.72 1798.6,566.3 1899.43,566.72 1954.43,566.72 2005.68,566.72 2102.35,566.72 2148.18,565.88 2342.35,566.3 2436.93,566.72 2479.02,566.72 2572.35,566.72 2624.43,566.72 2679.02,566.72 3474.85,566.3 510.68,567.55 720.27,567.55 807.77,567.55 854.02,567.55 897.35,567.55 942.35,567.13 988.18,567.13 1124.85,567.13 1208.6,567.13 1295.27,567.55 1485.68,567.55 1533.6,567.55 1846.52,567.13 2056.1,567.55 2197.77,567.13 2249.02,567.13 2293.18,567.55 2392.35,567.55 2524.43,567.55 2732.35,567.55 2937.35,567.13 3155.68,567.55 3612.77,567.13 3709.85,567.55 1030.68,567.97 1080.68,568.38 1345.27,567.97 1395.68,567.97 1443.18,568.38 2784.02,568.38 2835.27,567.97 2885.68,567.97 2991.93,568.38 3047.35,567.97 3099.85,568.38 3254.43,568.38 3303.6,567.97 3436.1,567.97 3515.68,567.97 3560.68,568.38 3659.02,567.97 1253.18,568.8 3205.68,568.8 3338.6,569.22
NetC1_1: C1.1 Q9.3 U3.27 | length 1152.8
  Top Layer w8: v1(1989.85,415.05) v1@1990.27,414.63
  Top Layer w9: U3.27@1839.92,268.64 1901.36,268.64 1932.66,299.95 1932.66,347.86 1937.77,352.97 1979.85,352.97 1986.52,359.63 1986.52,394.22 1990.27,397.97 v1@1990.27,414.63
  Top Layer w10: C1.1@1869.43,479.63 v2(2016.52,479.63) ; Q9.3@1876.93,134.22 1881.93,139.22 1902.77,139.22 v1(1905.27,141.72)
  MidLayer2 w12: v1(1905.27,141.72) 1907.77,141.72 1931.93,165.88 1931.93,266.72 1994.85,329.63 2151.52,329.63 2161.52,339.63 2161.52,390.05 2136.52,415.05 v1(1989.85,415.05)
  Bottom Layer w10: v1@1990.27,415.47 1990.27,453.38 v2(2016.52,479.63)
NetC2_2: C2.2 C8.2 U2.19 U2.20
NetC6_2: C6.2 R74.1 U2.13 | length 384.8
  Top Layer w8: C6.2@808.6,513.8 818.6,523.8 818.6,534.22 823.18,538.8 900.68,538.8 919.85,519.63 919.85,445.57 882.77,408.49 882.77,370.23 U2.13@876.01,363.48
  Top Layer w10: R74.1@755.68,460.88 C6.2@808.6,513.8
NetC7_2: C7.2 C40.2 L1.1 R36.1 R66.2 R74.2 SD.2 U10.1 U10.2 | length 478.3
  Top Layer w6: R66.2@749.02,419.22 749.02,417.97 764.43,402.55 v1(799.85,402.55) 799.85,452.97 832.77,485.88 879.43,485.88 901.52,463.8 R36.1@903.18,463.8
  MidLayer2 w9: v1@757.77,176.72 759.02,177.97 759.02,360.47 799.85,401.3 v1(799.85,402.55)
  other v1: 757.35,176.3
NetC12_1: C12.1 C39.1 D1.1 DS1.1 P1.1 pad.@515.68,152.13 U10.4 U10.7 U10.8 | length 115.7
  Top Layer w12: v1(642.35,224.63) 642.35,213.69 U10.4@645.27,210.77
  MidLayer2 w12: v1(583.18,160.88) 583.18,161.3 642.35,220.47 v1(642.35,224.63)
  Bottom Layer w12: pad.@506.52,144.43 514.22,152.13 pad.@515.68,152.13
  other v1: 536.93,45.05 523.6,58.38 542.35,63.38 509.43,72.13 528.6,77.55
NetC20_2: C20.2 R27.1 U3.38 | length 91.3
  Top Layer w8: R27.1@1677.77,427.13 1682.77,422.13 1682.77,389.63 1700.93,371.47 U3.38@1700.93,345.4
NetC21_1: C21.1 R26.1 U3.36 | length 93.4
  Top Layer w8: R26.1@1713.6,427.55 1719.43,421.72 1719.43,398.8 C21.1@1715.27,394.63 1715.27,390.88 1732.43,373.72 U3.36@1732.43,345.4
NetC21_2: C21.2 R25.1 U3.35 | length 80.9
  Top Layer w8: U3.35@1749.43,346.66 R25.1@1749.43,427.55
NetC22_1: C22.1 R24.1 U3.32 | length 89.6
  Top Layer w8: R24.1@1784.02,427.55 1787.77,423.8 1787.77,396.72 C22.1@1784.43,393.38 1787.77,390.05 1787.77,377.97 1795.42,370.32 U3.32@1795.42,345.4
NetC22_2: C22.2 R23.1 U3.31 | length 84.4
  Top Layer w8: U3.31@1811.17,345.4 1811.17,375.12 1816.1,380.05 1816.1,397.13 1816.1,424.22 R23.1@1818.6,426.72
NetC23_1: C23.1 C61.1 CN1.7 CN1.8 pad.@2197.35,297.13 R16.1 U3.28 U5.10 | length 349.5
  Top Layer w6: U3.28@1839.92,284.39 1874.19,284.39 1890.68,300.88 1893.6,297.97 1906.93,297.97 1920.06,311.09 1920.06,399.95 1935.16,415.05 v1(1946.1,415.05)
  MidLayer2 w12: v1(1946.1,415.05) 1972.35,388.8 2055.27,388.8 v1(2065.68,378.38)
  other v1: 2646.93,303.8 2628.18,304.63 2712.77,314.22 2734.02,314.22 2649.43,323.38 2628.18,325.05 2065.68,356.3 2111.1,356.3 2135.27,356.72 2088.18,357.55 2089.02,377.97 2133.18,378.38 2112.35,378.8
NetC23_2: C23.2 R73.1 U3.30 | length 107
  Top Layer w8: U3.30@1839.92,315.88 1857.77,315.88 1868.18,326.3 1868.18,376.3 R73.1@1869.43,377.55 ; 1869.43,335.05 1890.27,335.05 C23.2@1891.52,336.3
NetC24_1: C24.1 C30.1 CN1.9 CN1.10 pad.@2382.77,375.47 R17.1 U3.24 U6.10 | length 483.7
  Top Layer w8: U3.24@1839.92,221.4 1921.2,221.4 1945.27,245.47 C24.1@1956.93,245.47
  Top Layer w12: C24.1@1957.77,246.3 v1(1979.43,246.3)
  MidLayer2 w12: v1(1979.43,246.3) 2022.77,289.63 2167.77,289.63 2235.27,357.13 v1(2268.6,357.13)
  other v1: 2708.6,345.47 2727.77,345.47 2746.93,347.13 2291.1,356.3 2313.6,356.3 2337.77,356.3 2746.52,364.63 2707.77,365.47 2726.52,365.05 2335.27,375.47 2270.27,376.3 2291.1,376.3 2313.6,376.3
NetC24_2: C24.2 R72.1 U3.26 | length 181.6
  Top Layer w8: U3.26@1839.92,252.89 1911.86,252.89 1944.02,285.05 1961.1,285.05 1967.35,291.3 1967.35,318.38 R72.1@1959.43,326.3
NetC25_1: C25.1 C31.1 CN1.11 CN1.12 pad.@2527.77,354.63 R18.1 U3.21 U7.10 | length 807.1
  Top Layer w6: U3.21@1839.92,174.15 1927.28,174.15 1952.77,199.63 2003.18,199.63 C25.1@2009.02,193.8 2010.27,192.55 2026.52,192.55 2039.85,205.88 v1(2044.02,205.88)
  MidLayer2 w12: v1(2044.02,205.88) 2040.68,205.88 2032.77,213.8 2017.77,213.8 2011.1,220.47 2011.1,246.3 2035.68,270.88 2179.02,270.88 2232.77,324.63 2398.18,324.63 2430.68,357.13 v1(2484.43,357.13)
  other v1: 2526.1,357.97 2548.18,359.22 2506.1,360.47
NetC25_2: C25.2 R71.1 U3.23 | length 222
  Top Layer w8: U3.23@1839.92,205.65 1924.2,205.65 1942.77,224.22 2004.02,224.22 C25.2@2009.02,229.22 2009.02,262.97 R71.1@2015.68,269.63
NetC26_2: C26.2 R12.1 U3.16 | length 419.3
  Top Layer w6: U3.16@1748.17,144.63 1748.17,129.64 1760.68,117.13 1773.6,117.13 1793.39,97.34 1823.39,97.34 1864.85,55.88 2008.81,55.88 2047.97,95.05 2063.18,95.05 2068.18,100.05 2100.68,100.05 R12.1@2102.77,97.97
NetC27_1: C27.1 FU1.1 FU2.1 FU3.2 R15.1 R24.2 R25.2 R27.2 U5.5 U5.6 U5.7 | length 2488.2
  Top Layer w16: R27.2@1677.77,461.72 1677.77,475.88 v1(1678.6,476.72) ; R25.2@1749.43,462.13 v1@1749.43,477.13 ; v1(1783.6,477.13) 1784.02,476.72 R24.2@1784.02,462.13
  Bottom Layer w10: v1(1678.6,476.72) 1680.68,478.8 1680.68,494.22 1691.93,505.47 1836.52,505.47 1844.85,497.13 1844.85,451.47 1949.43,346.89 1949.43,235.47 2032.77,152.13 2176.1,152.13 2183.18,159.22 2183.18,171.3 v1(2196.52,184.63) ; v1(1749.85,477.55) 1751.31,477.55 1902.56,326.3 1902.56,215.68 2011.93,106.3 2215.27,106.3 2257.77,148.8 2418.6,148.8 2419.02,149.22 2423.18,149.22 2426.1,152.13 v1@2426.1,167.13 ; v1(1783.6,477.13) 1802.35,458.38 1802.35,450.67 1918.6,334.42 1918.6,222.13 2019.43,121.3 2207.77,121.3 2255.27,168.8 v1(2262.35,168.8)
  other v1: 2424.43,166.3 2395.27,177.55 2216.1,185.88 2395.27,197.13 2215.27,204.63 2196.1,205.47 2395.27,215.47 2215.68,223.8 2195.27,225.88 2396.52,232.55 2433.18,232.55 2415.27,232.97
NetC27_2: C27.2 R14.2 R15.2 U5.8 | length 106.3
  Top Layer w6: U5.8@2141.1,329.22 2141.1,301.72 2146.1,296.72 2216.1,296.72 R14.2@2217.35,295.47
NetC28_1: C28.1 FU2.2 R23.2 R67.1 U6.5 U6.6 U6.7 | length 771.9
  Top Layer w12: FU2.2@2322.6,172.55 2323.6,172.55 v1(2324.02,172.13)
  Top Layer w16: R23.2@1818.6,461.3 1818.6,476.3 v1(1819.43,477.13)
  Bottom Layer w10: v1(1819.43,477.13) 1821.52,475.05 1821.52,453.59 1933.6,341.51 1933.6,229.22 2026.1,136.72 2201.1,136.72 2255.27,190.88 2305.27,190.88 v1(2324.02,172.13)
NetC28_2: C28.2 R67.2 R68.2 U6.8 | length 106.9
  Top Layer w6: U6.8@2343.18,329.63 2344.43,329.63 2354.85,319.22 2354.85,300.05 2354.02,299.22 R67.2@2354.02,263.38 ; C28.2@2353.18,298.38 2387.35,298.38 R68.2@2387.77,297.97
NetC29_1: C29.1 FU1.2 R26.2 R69.1 U7.5 U7.6 U7.7 | length 1068.8
  Top Layer w15: v1(2498.6,167.55) FU1.2@2498.6,182.13
  Top Layer w16: R26.2@1713.6,462.13 v1@1713.6,476.72
  Bottom Layer w10: v1(1714.02,477.13) 1714.85,477.13 1740.27,451.72 1754.85,451.72 1886.93,319.63 1886.93,209.22 2004.85,91.3 2222.35,91.3 2264.43,133.38 2466.93,133.38 v1@2498.6,165.05
NetC29_2: C29.2 R69.2 R70.2 U7.8 | length 96.7
  Top Layer w6: U7.8@2544.02,329.22 2545.27,327.97 R69.2@2545.27,265.88 ; C29.2@2546.52,299.22 2578.18,299.22 R70.2@2579.02,298.38
NetC30_2: C30.2 R17.2 R20.1 U6.1 | length 113
  Top Layer w6: U6.1@2343.18,439.22 2385.68,439.22 R20.1@2386.93,440.47 C30.2@2386.93,406.72 R17.2@2421.93,406.72
NetC31_2: C31.2 R18.2 R19.1 U7.1 | length 123.1
  Top Layer w6: U7.1@2544.02,438.8 2585.27,438.8 2586.93,437.13 R18.2@2586.93,426.3 2621.52,426.3 C31.2@2622.35,427.13 ; R18.2@2586.1,427.13 R19.1@2586.1,460.05